# Altium PCB RS232-MITM.PcbDoc
Units mm, origin at the board's own origin, x right, y up, seen from the top; angles counter-clockwise.
Board outline 152.4 x 101.6 mm, 3 copper layers (Top Layer, Wire, Bottom Layer), stack 0.488 mm thick; 4 components, 7 nets, 36 pads, 8 vias.
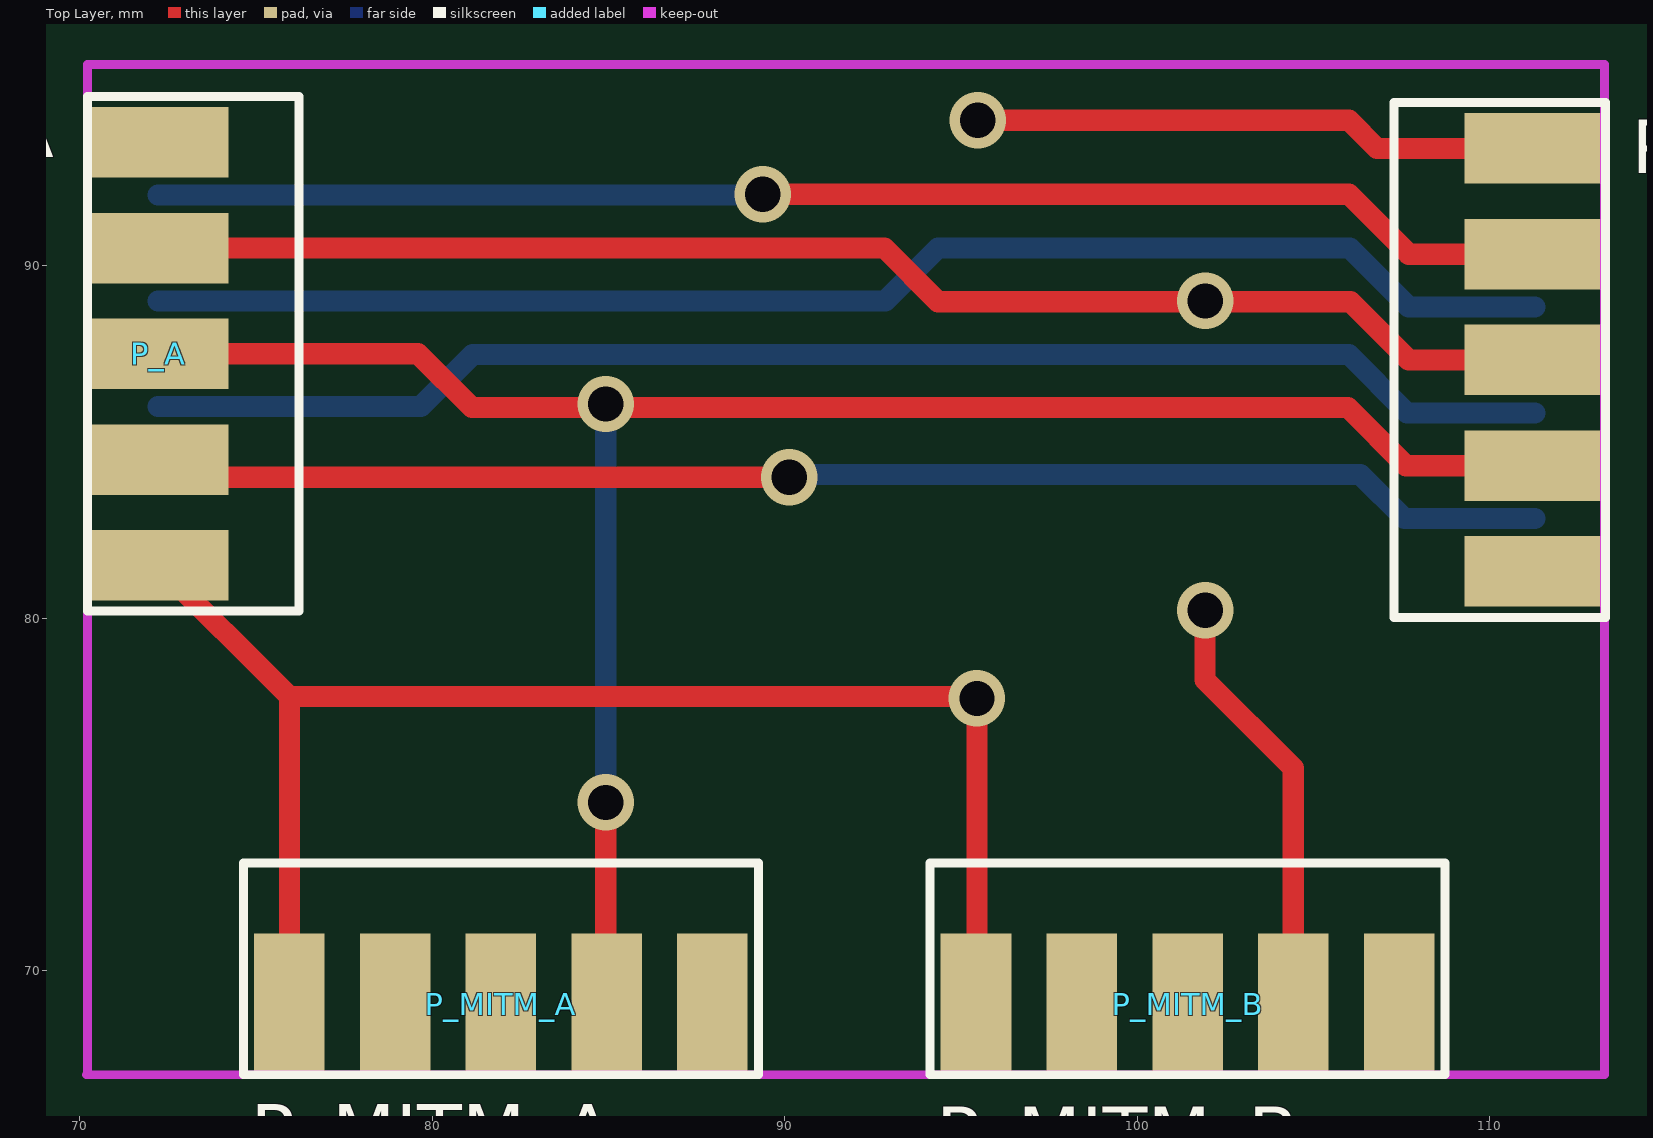
[diagram p0: Top Layer view]
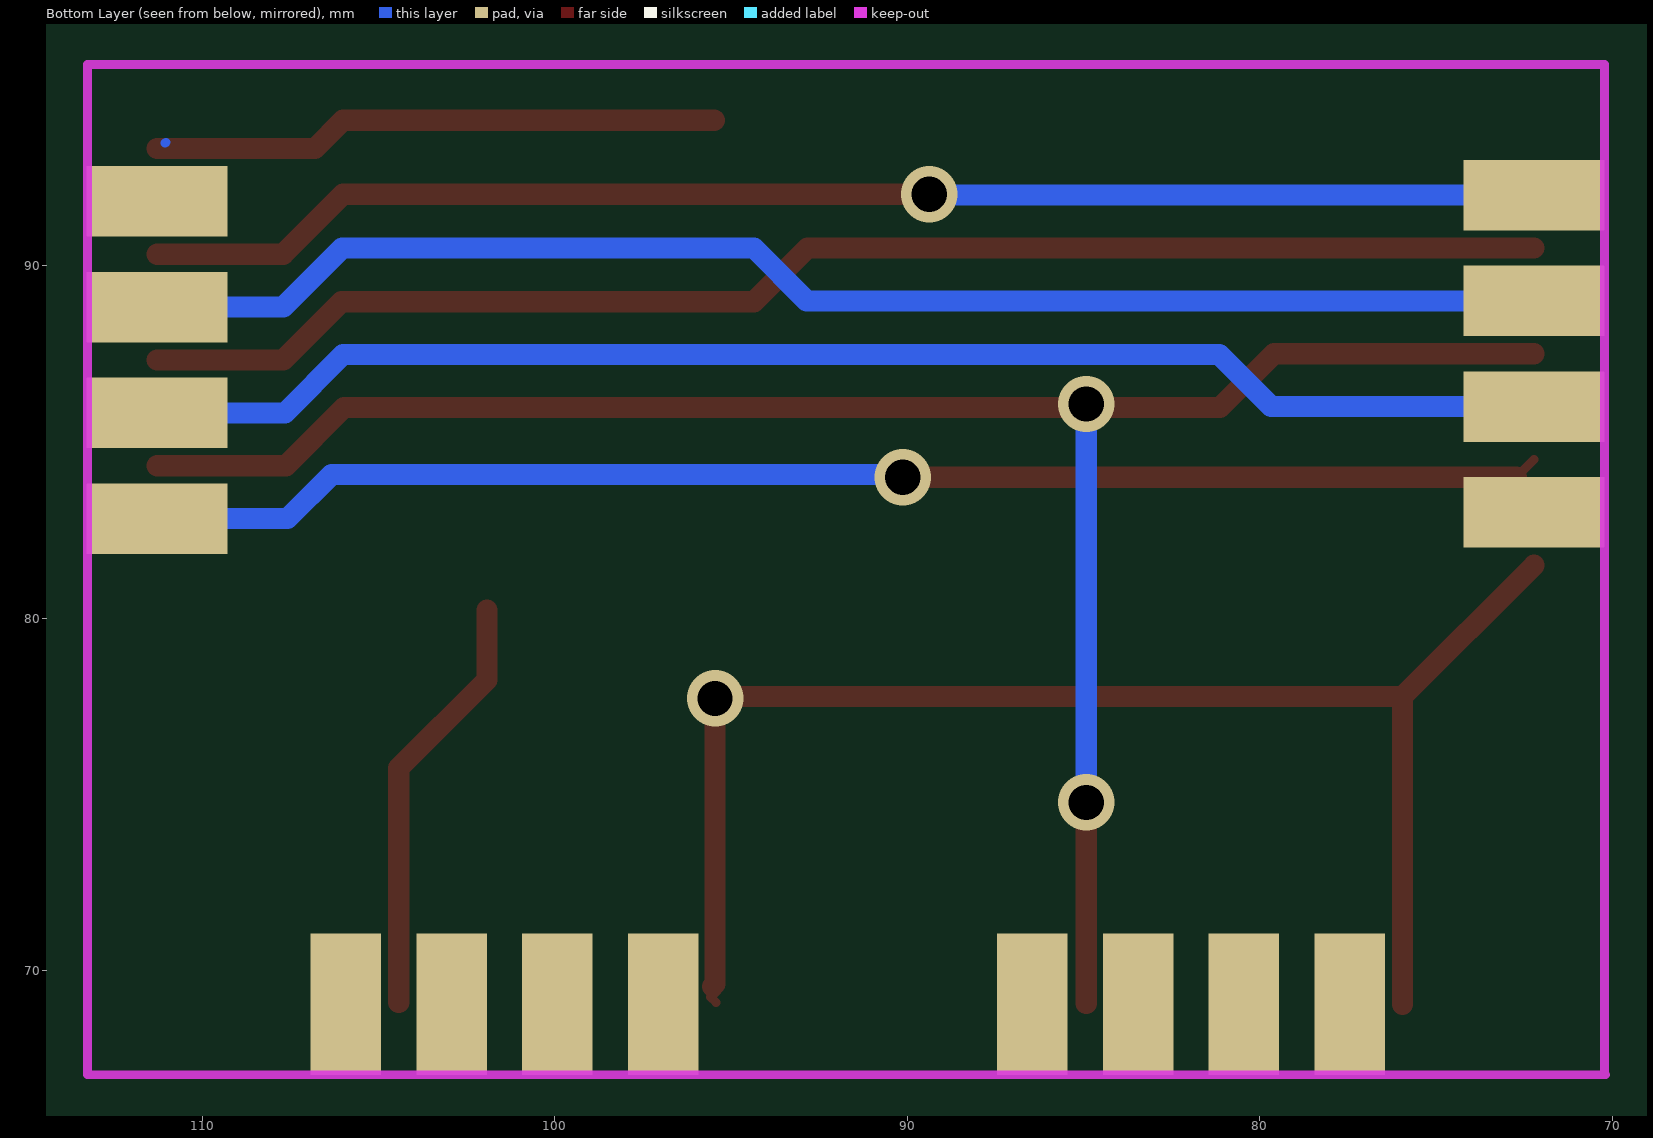
[diagram p1: Bottom Layer view, seen from below]
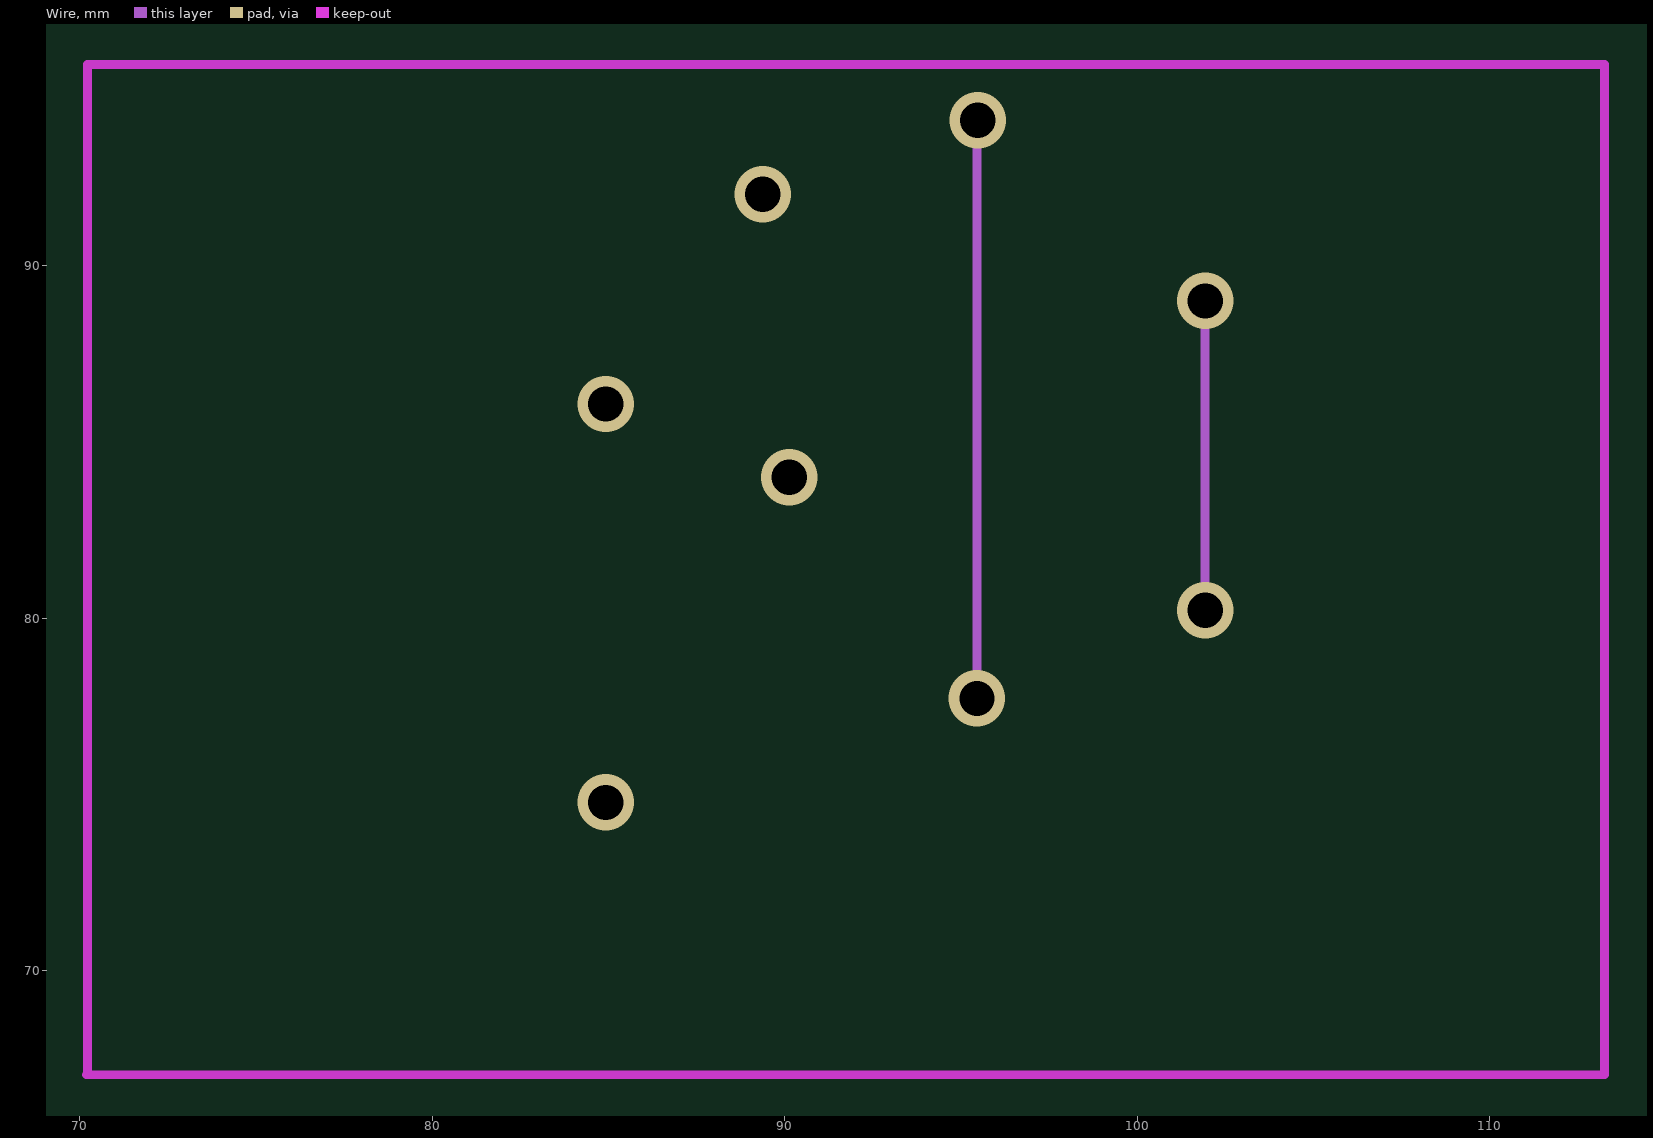
[diagram p2: Wire]

## Layer stack, top to bottom
Top Solder: solder mask 0.0102, Solder Resist, Dk 3.5
Top Layer: signal copper 0.0356
Dielectric 1: core 0.254, FR-4, Dk 4.2
Wire: signal copper 0.036
Dielectric 2: prepreg 0.127, Dk 4.2
Bottom Layer: signal copper 0.0356
Bottom Solder: solder mask 0.0102, Solder Resist, Dk 3.5

## Board outline
25.4,25.4 177.8,25.4 177.8,127 25.4,127

## Design rules (kind name [scope] priority, off if disabled: settings)
Clearance [All] p1: gap=0.254
PolygonConnect [All] p1: connectstyle=Relief reliefconductorwidth=0.254 reliefentries=4 polygonreliefangle="90 Angle" airgapwidth=0.254
RoutingVias [All] p1: holewidth=0.711 width=1.27 viastyle="Through Hole" minholewidth=0.711 minwidth=1.27 maxholewidth=0.711 maxwidth=1.27
SolderMaskExpansion [All] p1: expansion=0.102
UnpouredPolygon [All] p1: allowunpoured=FALSE
Width [All] p1: maxlimit=0.254 minlimit=0.254 preferedwidth=0.254
29 further rules are at their usual default settings.

## Components (designator, comment, footprint, x,y, rotation, side; value= is the part's Value field where it differs from the comment)
P_A "RS-232" RS-232 72.225,87.5 r90 top
P_B "RS-232" RS-232 111.275,87.325 r270 top
P_MITM_A "RS-232" "RS-232 mirrored" 81.95,69.05 r180 top
P_MITM_B "RS-232" "RS-232 mirrored" 101.425,69.05 r180 top

## Footprints (in the part's own frame and the unit in brackets; to place one, negate y for a bottom-side part, rotate by r counter-clockwise, add the part's x,y. Pads: shape width x height; smd on the part's side, far side on the other; paste and mask are expansions set on the pad)
RS-232 [mm]
  rect 2x4 smd: 1(6,0) 2(3,0) 3(0,0) 4(-3,0) 5(-6,0)
  rect 2x4 smd far side: 6(4.5,0) 7(1.5,0) 8(-1.5,0) 9(-4.5,0)
  silkscreen extent -7.3,-4 7.3,2
"RS-232 mirrored" [mm]
  rect 2x4 smd: 1(-6,0) 2(-3,0) 3(0,0) 4(3,0) 5(6,0)
  rect 2x4 smd far side: 6(-4.5,0) 7(-1.5,0) 8(1.5,0) 9(4.5,0)
  silkscreen extent -7.3,-4 7.3,2

## Via types
v1: diameter 1.6, hole 1, Top Layer to Bottom Layer, 5 vias
v2: diameter 1.6, hole 1, Top Layer to Wire, 3 vias

## Nets (pads, with @x,y where several pads share a name; then routed paths per layer and width w, separated by ;. In a path a pad name is that pad's centre, name@x,y a point inside that pad or via, vN(x,y) a via of type N, cw(c..) or ccw(c..) an arc to the next point about the centre after c; other vN are vias at no path point)
NetP_A_2: P_A.2 P_B.3 P_MITM_B.2 | length 61.3
  Top Layer w0.6: P_A.2 92.825,90.5 94.35,88.975 106.05,88.975 107.7,87.325 P_B.3 ; v2(101.925,80.225) 101.925,78.25 104.425,75.75 P_MITM_B.2@104.425,69.1
  Wire w0.254: v2(101.925,80.225) v2(101.925,89)
NetP_A_3: P_A.3 P_B.2 P_MITM_A.2 | length 57.4
  Top Layer w0.254: P_MITM_A.2@84.925,69.075 P_MITM_A.2
  Top Layer w0.6: P_A.3 79.6,87.5 81.125,85.975 105.975,85.975 107.625,84.325 P_B.2 ; P_MITM_A.2@84.925,69.075 v1(84.925,74.775)
  Bottom Layer w0.6: v1(84.925,74.775) v1(84.925,86.075)
NetP_A_4: P_A.4 P_B.6 | length 40.1
  Top Layer w0.254: P_A.4 P_A.4@72.725,84
  Top Layer w0.6: P_A.4@72.725,84 v1(90.125,84)
  Bottom Layer w0.254: v1(90.125,84) 90.125,84.225 v1@90.275,84.075
  Bottom Layer w0.6: v1@90.275,84.075 106.325,84.075 107.575,82.825 P_B.6
NetP_A_5: P_A.5 P_B.5 P_MITM_A.5 P_MITM_B.5 | length 75.3
  Top Layer w0.254: P_MITM_B.5@95.425,69.1 95.575,69.25 95.4,69.425 P_MITM_B.5@95.525,69.55
  Top Layer w0.6: P_A.5 75.95,77.775 ; P_MITM_A.5 75.95,77.775 ; v2(95.475,94.125) 106,94.125 106.8,93.325 P_B.5 ; P_MITM_B.5@95.525,69.55 95.45,69.625 95.45,77.975 95.25,77.775 75.95,77.775
  Wire w0.254: v1(95.45,77.725) 95.45,77.975 v2@95.45,94.125
  Bottom Layer w0.254: v1(95.45,77.725) 95.45,77.8 v1@95.475,77.775
NetP_A_6: P_A.6 P_B.4 | length 39.8
  Top Layer w0.6: v1(89.375,92.025) 106,92.025 107.7,90.325 P_B.4
  Bottom Layer w0.254: v1@89.35,92 v1(89.375,92.025)
  Bottom Layer w0.6: P_A.6 v1@89.35,92
NetP_A_7: P_A.7 P_B.8 | length 40.4
  Bottom Layer w0.6: P_A.7 92.85,89 94.35,90.5 106.025,90.5 107.7,88.825 P_B.8
NetP_A_8: P_A.8 P_B.7 | length 40.3
  Bottom Layer w0.6: P_A.8 79.675,86 81.15,87.475 106,87.475 107.65,85.825 P_B.7
pads on no net: P_A.1 P_A.9 P_B.1 P_B.9 P_MITM_A.1 P_MITM_A.3 P_MITM_A.4 P_MITM_A.6 P_MITM_A.7 P_MITM_A.8 P_MITM_A.9 P_MITM_B.1 P_MITM_B.3 P_MITM_B.4 P_MITM_B.6 P_MITM_B.7 P_MITM_B.8 P_MITM_B.9
copper on no net: | length 0
  Bottom Layer w0.254: 111.025,93.5 111.05,93.475

## Keep-outs
Keep-Out Layer:
  lines w0.254: 70.2,67.05 113.25,67.05 113.25,95.625 113.25,95.7 70.225,95.7 70.225,67.05